# Altium PCB PCB1.PcbDoc
Units mil, origin at the board's own origin, x right, y up, seen from the top; angles counter-clockwise.
Board outline 1574.8 x 1400.79 mil, 4 copper layers (Top Layer, PWR02, GND03, Bottom Layer), stack 46.063 mil thick; 65 components, 63 nets, 282 pads, 13 vias.
Unrouted connection lines stored in the file: 167.
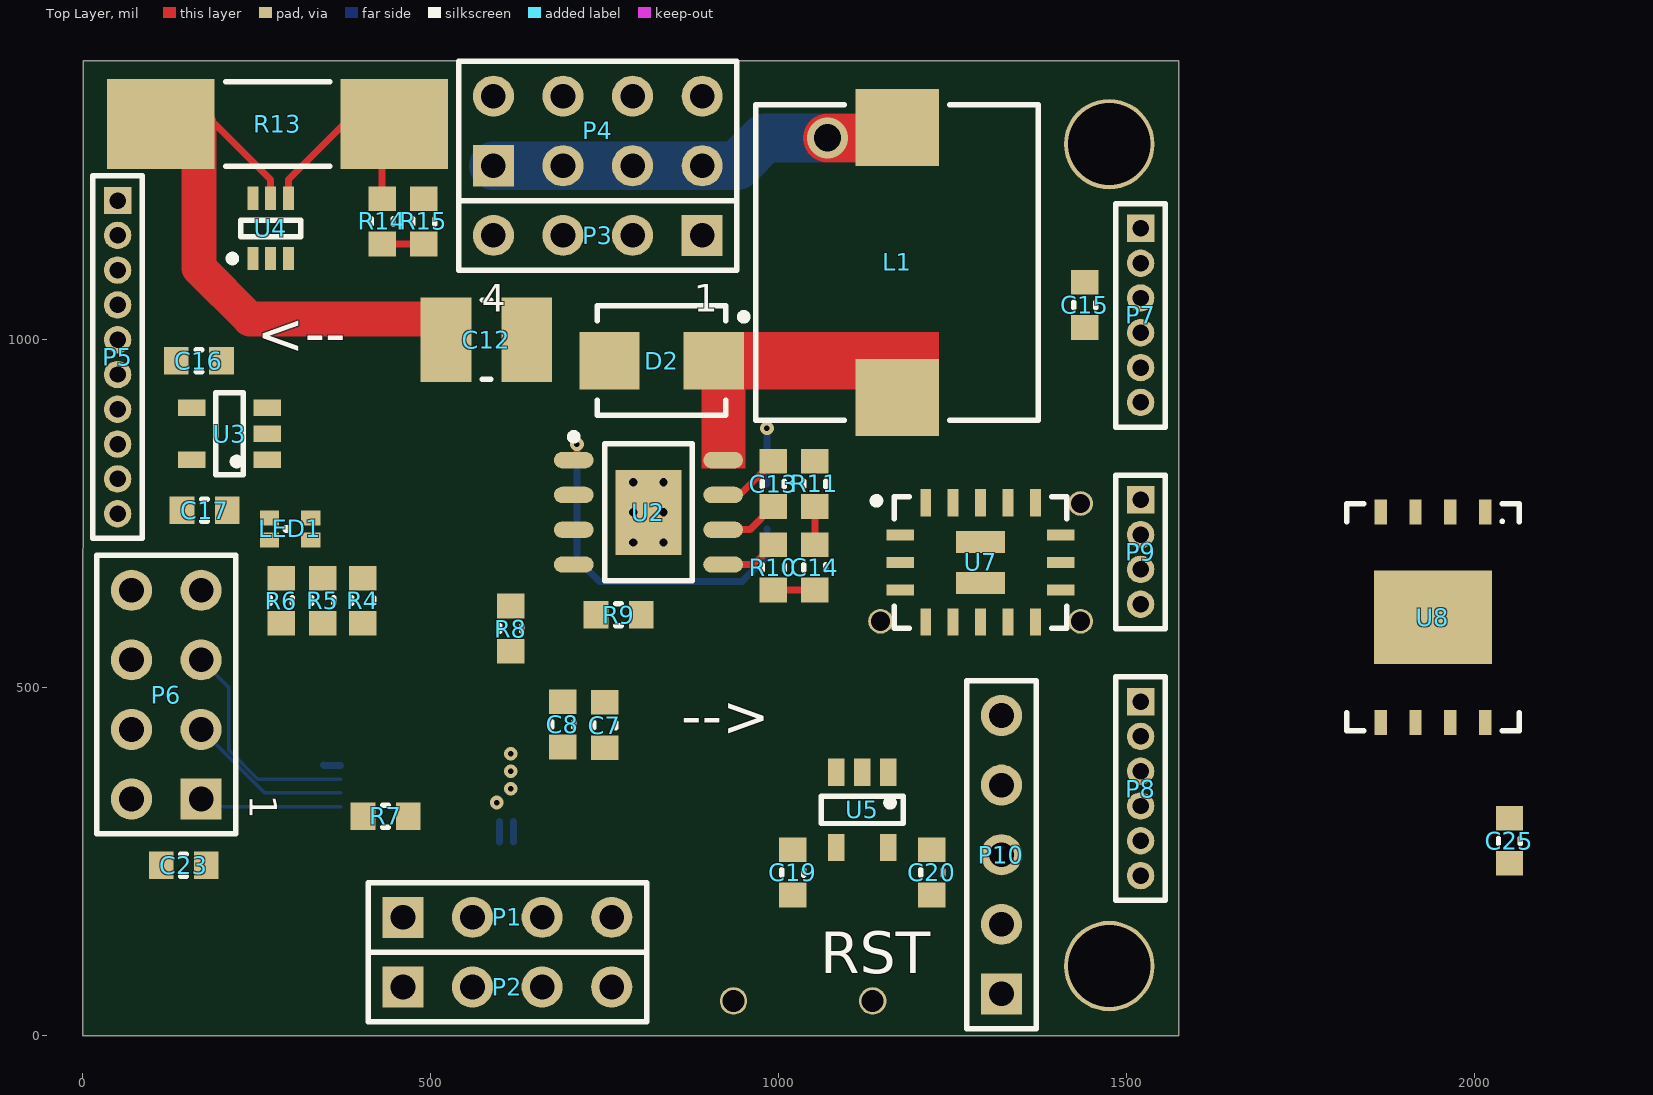
[diagram p0: Top Layer view]
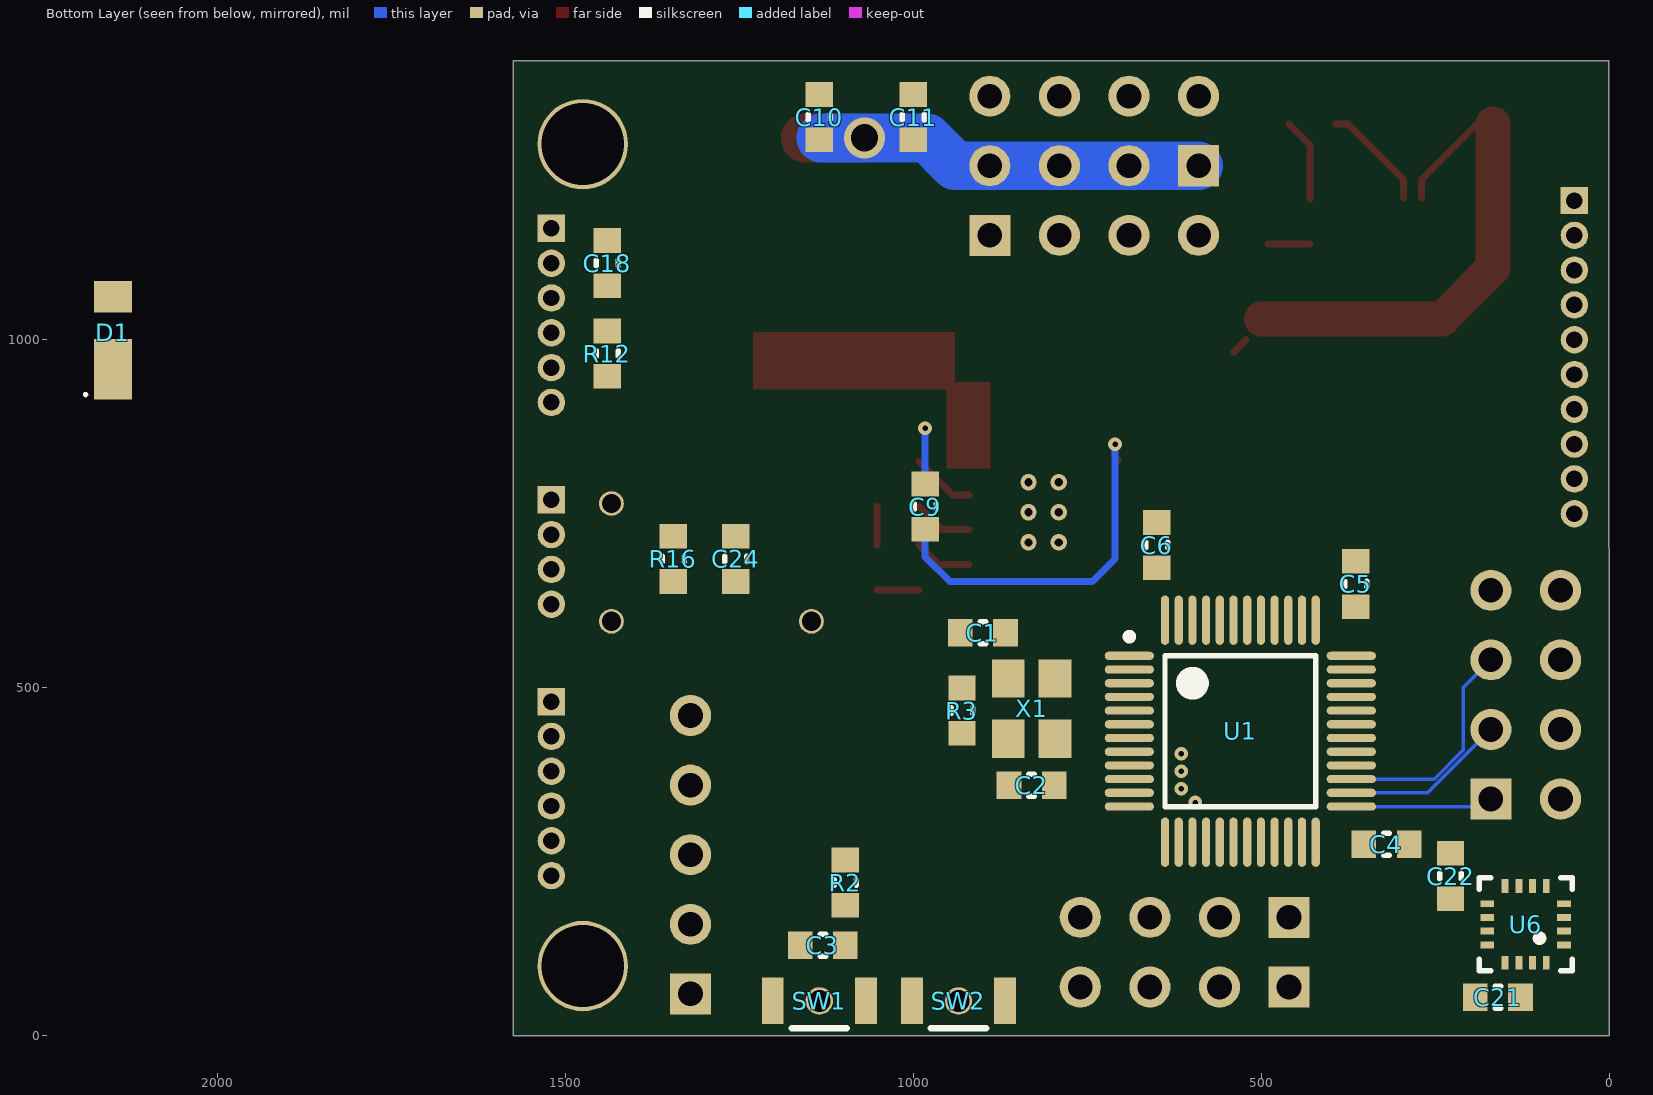
[diagram p1: Bottom Layer view, seen from below]

## Layer stack, top to bottom
Top Solder: solder mask 0.4, Solder Resist, Dk 3.5
Top Layer: signal copper 1.378
Dielectric 1: prepreg 7.874, FR-4, Dk 4.2
PWR02: signal copper 0.689
Dielectric 3: core 26.1811, Dk 4.2
GND03: signal copper 0.689
Dielectric 2: prepreg 7.874, Dk 4.2
Bottom Layer: signal copper 1.378
Bottom Solder: solder mask 0.4, Solder Resist, Dk 3.5

## Board outline
0,0 1574.8,0 1574.8,1400.79 0.79,1400.79

## Design rules (kind name [scope] priority, off if disabled: settings)
Clearance [All] p1: gap=5 ignorepadtopadclearanceinfootprint=FALSE
PolygonConnect [All] p1: connectstyle=Direct reliefconductorwidth=10 reliefentries=4 polygonreliefangle="90 Angle" airgapwidth=10
RoutingVias [All] p1: holewidth=7.87 width=19.68 viastyle="Through Hole" minholewidth=7.87 minwidth=19.68 maxholewidth=27.56 maxwidth=78.74
SolderMaskExpansion [All] p1: expansion=4
Width [All] p1: maxlimit=200 minlimit=5 preferedwidth=10 midlayer1_maxwidth=10 midlayer2_maxwidth=10 minimp=50.000000 maximp=50.000000 favimp=50.000000
30 further rules are at their usual default settings.

## Components (designator, comment, footprint, x,y, rotation, side; value= is the part's Value field where it differs from the comment)
C1 "20pF" 0603 900,579.02 r0 bottom
C2 "20pF" 0603 830,360 r0 bottom
C3 "1uF" 0603 1130,130 r0 bottom
C4 "100nF" 0603 320,275 r0 bottom
C5 "100nF" 0603 364,649 r270 bottom
C6 "100nF" 0603 649.96,705 r270 bottom
C7 "100nF" 0603 750,446.36 r90 top
C8 "10uF" 0603 689.45,447.36 r90 top
C9 "100nF" 0603 983,760.31 r90 bottom
C10 "22uF" 0603 1135,1320 r270 bottom
C11 "22uF" 0603 1000,1320 r270 bottom
C12 "10uF" 1210 580,1000 r180 top
C13 "8.2nF" 0603 992,792.79 r270 top
C14 "330pF" 0603 1052,672.79 r270 top
C15 "1uF" 0603 1440,1050 r90 top
C16 "470pF" 0603 166.81,970 r180 top
C17 "2.2uF" 0603 175,755 r180 top
C18 "100nF" 0603 1440,1110 r270 bottom
C19 "470pF" 0603 1020,234.53 r90 top
C20 "2.2uF" 0603 1220,234.53 r90 top
C21 "100nF" 0603 160,55 r0 bottom
C22 "4.7uF" 0603 228,229.39 r270 bottom
C23 "0.22uF" 0603 145,245 r0 top
C24 "100nF" 0603 1255,685 r90 bottom
C25 "100nF" 0603 2050,280 r90 top
D1 "DFLS130L-7" PowerDI123 2150,1000 r90 bottom
D2 "SK1045B" "SMB (DO-214AA)" 831.65,970 r0 top
L1 "Inductor" Ind1040 1170,1111 r90 top
LED1 "RGB_CA" RGB1.6*1.6 297.93,728.13 r270 top
P1 "Header 4" HDR1X4 460,170 r0 top
P2 "Header 4" HDR1X4 460,70 r0 top
P3 "Header 4" HDR1X4 890,1150 r180 top
P4 "Header 4X2" HDR2X4 590,1250 r0 top
P5 "MHDR1X10" MHDR1X10 50,1200 r270 top
P6 "Header 4X2" HDR2X4 170,340 r90 top
P7 "MHDR1X6" MHDR1X6 1520,1160 r270 top
P8 "MHDR1X6" MHDR1X6 1520,480 r270 top
P9 "MHDR1X4" MHDR1X4 1520,770 r270 top
P10 "Header 5" HDR1X5 1320,60 r90 top
R2 "10k" 0603 1097.52,220 r90 bottom
R3 "1M" 0603 930,467.05 r90 bottom
R4 "1k" 0603 402.52,625 r270 top
R5 "1k" 0603 345,625 r270 top
R6 "1k" 0603 285,625 r270 top
R7 "10k" 0603 435,315 r180 top
R8 "10k" 0603 615,585 r270 top
R9 "20k" 0603 770,605 r180 top
R10 "91k" 0603 992,672.79 r270 top
R11 "15k" 0603 1052,792.79 r270 top
R12 "680" 0603 1440,980 r90 bottom
R13 "1mR" 2512 280,1310 r180 top
R14 "4.7k" 0603 430,1170 r90 top
R15 "1k" 0603 490,1170 r270 top
R16 "0R" 0603 1345,685 r270 bottom
SW1 "Btn" BTN_B3U_B 1135,50 r0 bottom
SW2 "Btn" BTN_B3U_B 935,50 r0 bottom
U1 "STM32F103C8T6" LQFP48_N 530,437.52 r180 bottom
U2 "LMR14030 EZ" SOP8-Pad 812.72,752 r0 top
U3 "MIC5219" SOT23-5 210.83,865 r180 top
U4 "INA190" SC70 270,1160 r90 top
U5 "MIC5219" SOT23-5 1120,324.53 r270 top
U6 "QMC5883L" QMC5883 120,160 r0 bottom
U7 "SDP3x_D" SDP3x 1290,680 r0 top
U8 "W25Q128VE" WSON8-8x6mm 1940,601.18 r270 top
X1 "8M" XTAL-3225-4 830,470 r90 bottom

## Footprints (in the part's own frame and the unit in brackets; to place one, negate y for a bottom-side part, rotate by r counter-clockwise, add the part's x,y. Pads: shape width x height; smd on the part's side, far side on the other; paste and mask are expansions set on the pad)
0603 [mm]
  rect 0.9x1 smd: 1(-0.825,0) 2(0.825,0)
  silkscreen extent -0.1,-0.4 0.1,0.4
1210 [mm]
  rect 1.85x3.1 smd: 1(-1.475,0) 2(1.475,0)
  silkscreen extent -0.15,-1.45 0.15,1.45
2512 [mm]
  rect 1.15x3.3 smd: 1(-2.875,0) 2(2.875,0)
  silkscreen extent -1.9,-1.55 1.9,1.55, body extent -3.3,-1.7 3.3,1.7, height 0.65
BTN_B3U_B [mm]
  rect 0.8x1.7 smd: 1(-1.7,0) 2(1.7,0)
  round 1 hole 0.8: ""(0,0)
  silkscreen extent -1,1 1,1
HDR1X4 [mm] "Connector; Header; 4 Position"
  rect 1.5x1.5 hole 0.9: 1(0,0)
  round 1.5 hole 0.9: 2(2.54,0) 3(5.08,0) 4(7.62,0)
  silkscreen extent -1.27,-1.27 8.89,1.27
HDR1X5 [mm] "Connector; Header; 5 Position"
  rect 1.5x1.5 hole 0.9: 1(0,0)
  round 1.5 hole 0.9: 2(2.54,0) 3(5.08,0) 4(7.62,0) 5(10.16,0)
  silkscreen extent -1.27,-1.27 11.43,1.27
HDR2X4 [mm] "Connector; Header; 4x2 Position"
  rect 1.5x1.5 hole 0.9: 1(0,0)
  round 1.5 hole 0.9: 2(0,2.54) 3(2.54,0) 4(2.54,2.54) 5(5.08,0) 6(5.08,2.54) 7(7.62,0) 8(7.62,2.54)
  silkscreen extent -1.27,-1.27 8.89,3.81
Ind1040 [mm] "Inductor 11.5*10*4"
  rect 2.8x3.05 smd: 1(-4.925,0) 2(4.925,0)
  silkscreen extent -5.75,-5.15 5.75,5.15
LQFP48_N [mm] "Thin QFP, 48-Leads, Body 7x7mm, Pitch 0.5mm, IPC Medium Density"
  oval 1.8x0.3 smd: 1(-4.05,2.75) 2(-4.05,2.25) 3(-4.05,1.75) 4(-4.05,1.25) 5(-4.05,0.75) 6(-4.05,0.25) 7(-4.05,-0.25) 8(-4.05,-0.75) 9(-4.05,-1.25) 10(-4.05,-1.75) 11(-4.05,-2.25) 12(-4.05,-2.75) 25(4.05,-2.75) 26(4.05,-2.25) 27(4.05,-1.75) 28(4.05,-1.25) 29(4.05,-0.75) 30(4.05,-0.25) 31(4.05,0.25) 32(4.05,0.75) 33(4.05,1.25) 34(4.05,1.75) 35(4.05,2.25) 36(4.05,2.75)
  oval 0.3x1.8 smd: 13(-2.75,-4.05) 14(-2.25,-4.05) 15(-1.75,-4.05) 16(-1.25,-4.05) 17(-0.75,-4.05) 18(-0.25,-4.05) 19(0.25,-4.05) 20(0.75,-4.05) 21(1.25,-4.05) 22(1.75,-4.05) 23(2.25,-4.05) 24(2.75,-4.05) 37(2.75,4.05) 38(2.25,4.05) 39(1.75,4.05) 40(1.25,4.05) 41(0.75,4.05) 42(0.25,4.05) 43(-0.25,4.05) 44(-0.75,4.05) 45(-1.25,4.05) 46(-1.75,4.05) 47(-2.25,4.05) 48(-2.75,4.05)
  silkscreen extent -4.18,-2.75 2.75,3.57, body extent -3.5,-3.5 3.5,3.5, height 1.6
MHDR1X4 [mm] "Connector; Header; 4 Position"
  rect 1x1 hole 0.6: 1(0,0)
  round 1 hole 0.6: 2(1.27,0) 3(2.54,0) 4(3.81,0)
  silkscreen extent -0.9,-0.9 4.71,0.9
MHDR1X6 [mm] "Connector; Header; 6 Position"
  rect 1x1 hole 0.6: 1(0,0)
  round 1 hole 0.6: 2(1.27,0) 3(2.54,0) 4(3.81,0) 5(5.08,0) 6(6.35,0)
  silkscreen extent -0.9,-0.9 7.25,0.9
MHDR1X10 [mm] "Connector; Header; 10 Position"
  rect 1x1 hole 0.6: 1(0,0)
  round 1 hole 0.6: 2(1.27,0) 3(2.54,0) 4(3.81,0) 5(5.08,0) 6(6.35,0) 7(7.62,0) 8(8.89,0) 9(10.16,0) 10(11.43,0)
  silkscreen extent -0.9,-0.9 12.33,0.9
PowerDI123 [mm] "SODFL, 2-Leads, Body 1.78x3.70mm, IPC Medium Density"
  rect 1.15x1.4 smd: 1(1.575,0)
  rect 2.2x1.4 smd: 2(-1.075,0)
  silkscreen extent -2.05,0.95 -1.95,1.05
QMC5883 [mm]
  rect 0.5x0.25 smd: 1(-1.4,0.75) 2(-1.4,0.25) 3(-1.4,-0.25) 4(-1.4,-0.75) 9(1.4,-0.75) 10(1.4,-0.25) 11(1.4,0.25) 12(1.4,0.75)
  rect 0.25x0.5 smd: 5(-0.75,-1.4) 6(-0.25,-1.4) 7(0.25,-1.4) 8(0.75,-1.4) 13(0.75,1.4) 14(0.25,1.4) 15(-0.25,1.4) 16(-0.75,1.4)
  silkscreen extent -1.7,-1.7 1.7,1.7, body extent -1.55,-1.55 1.55,1.55, height 0.95
RGB1.6*1.6 [mm]
  rect 0.55x0.7 smd: 1(-0.4,0.75) 2(0.4,0.75) 3(0.4,-0.75) 4(-0.4,-0.75)
  silkscreen extent -0.08,-0.2 0.08,-0.05
SC70 [mm]
  rect 0.85x0.4 smd: 1(-1.1,0.65) 2(-1.1,0) 3(-1.1,-0.65) 4(1.1,-0.65) 5(1.1,0) 6(1.1,0.65)
  silkscreen extent -1.22,-1.1 0.3,1.52, body extent -1.2,-1.07 1.2,1.07, height 1.1
SDP3x [mm] "QFN, 16-Leads, Body 6.00x4.50mm, Pitch 1.00mm, Thermal Pad 1.80x2.60mm, IPC Low Density"
  rect 1x0.4 smd: 1(-2.925,1) 2(-2.925,0) 3(-2.925,-1) 9(2.925,-1) 10(2.925,0) 11(2.925,1)
  rect 0.4x1 smd: 4(-2,-2.175) 5(-1,-2.175) 6(0,-2.175) 7(1,-2.175) 8(2,-2.175) 12(2,2.175) 13(1,2.175) 14(0,2.175) 15(-1,2.175) 16(-2,2.175)
  round 0.9 hole 0.7: ""(-3.65,-2.15) ""(3.65,-2.15) ""(3.65,2.15)
  rect 1.8x0.8 smd: ""(0,-0.75) ""(0,0.75)
  silkscreen extent -3.92,-2.4 3.15,2.4
"SMB (DO-214AA)" [mm] "Molded Diode, 2-Leads, Body 4.38x3.62mm, IPC Medium Density"
  rect 2.2x2.1 smd: 1(-1.9,0) 2(1.9,0)
  silkscreen extent -2.35,-2 3.13,2, body extent -2.35,-1.97 2.35,1.97, height 2.4
SOP8-Pad [mm]
  oval 1.45x0.6 smd: 1(-2.725,1.905) 2(-2.725,0.635) 3(-2.725,-0.635) 4(-2.725,-1.905) 5(2.725,-1.905) 6(2.725,-0.635) 7(2.725,0.635) 8(2.725,1.905)
  rect 2.4x3.1 smd: 9(0,0)
  silkscreen extent -2.85,-2.5 1.6,2.88
SOT23-5 [mm] "SOT23, 5-Leads, Body 2.90x2.80mm, Pitch 0.95mm, IPC Medium Density"
  rect 1x0.6 smd: 1(-1.375,0.95) 2(-1.375,0) 3(-1.375,-0.95) 4(1.375,-0.95) 5(1.375,0.95)
  silkscreen extent -0.5,-1.5 0.5,1.5
WSON8-8x6mm [mm]
  rect 0.9x0.45 smd: 1(-3.84,1.905) 2(-3.84,0.635) 3(-3.84,-0.635) 4(-3.84,-1.905) 5(3.84,-1.905) 6(3.84,-0.635) 7(3.84,0.635) 8(3.84,1.905)
  rect 3.4x4.3 smd paste-1.7: 9(0,0)
  silkscreen extent -4.15,-3.15 4.15,3.15
XTAL-3225-4 [mm]
  rect 1.4x1.2 smd: 1(-1.1,-0.85) 2(1.1,0.85) ""(-1.1,0.85) ""(1.1,-0.85)

## Part data
C1 C2 C3 C4 C5 C6 C7 C8 C9 C10 C11 C12 C13 C14 C15 C16 C17 C18 C19 C20 C21 C22 C23 C24 C25: library part Cap
D1 D2: library part Diode
P1 P2 P3 P9: "Header, 4-Pin", LatestRevisionDate=17-Jul-2002, LatestRevisionNote="Re-released for DXP Platform.", Publisher="Altium Limited"
P4 P6: "Header, 4-Pin, Dual row", LatestRevisionDate=17-Jul-2002, LatestRevisionNote="Re-released for DXP Platform.", Publisher="Altium Limited"
P5: "Header, 10-Pin", LatestRevisionDate=17-Jul-2002, LatestRevisionNote="Re-released for DXP Platform.", Publisher="Altium Limited"
P7 P8: "Header, 6-Pin", LatestRevisionDate=17-Jul-2002, LatestRevisionNote="Re-released for DXP Platform.", Publisher="Altium Limited"
P10: "Header, 5-Pin", LatestRevisionDate=17-Jul-2002, LatestRevisionNote="Re-released for DXP Platform.", Publisher="Altium Limited"
R2 R3 R4 R5 R6 R7 R8 R9 R10 R11 R12 R13 R14 R15 R16: library part Res
U1: "STM32 ARM-based 32-bit MCU with 64 Kbytes Flash, 48-pin LQFP, Industrial Temperature", ComponentLink1Description="Manufacturer Link", ComponentLink1URL=www.st.com/stm32, ComponentLink2Description=Datasheet, ComponentLink2URL=http://www.st.com/stonline/products/literature/ds/13587.pdf, DatasheetVersion="rev6, Mar-2008", PackageDescription="48-Pin Low-Profile Quad Flat Pack, 7 x 7 mm Body, 0.5 mm Pitch (LQFP48)", PackageReference=LQFP48, PackageVersion=Mar-2008, Published=30-May-2008, Publisher="Altium Limited"
U8: library part W25QxxxVE/A
X1: library part XTAL

## Free pads (board coordinates)
  rect 129.92x129.92 smd: ""(100,1310) ""(460,1310)
  round 129.92 hole 118.11: ""(1474.8,100) ""(1474.8,1281.1)

## Via types
v1: diameter 19.68, hole 7.87, Top Layer to Bottom Layer, 6 vias
v2: diameter 23.62, hole 11.81, Top Layer to Bottom Layer, tented both sides, 6 vias
v3: diameter 59.06, hole 39.37, Top Layer to Bottom Layer, 1 vias

## Nets (pads, with @x,y where several pads share a name; then routed paths per layer and width w, separated by ;. In a path a pad name is that pad's centre, name@x,y a point inside that pad or via, vN(x,y) a via of type N, cw(c..) or ccw(c..) an arc to the next point about the centre after c; other vN are vias at no path point)
+5: D1.2 P2.1 P6.8 P8.4 P9.4 U3.1 U3.3 U5.1 U5.3
+5.3: C10.2 C11.2 C14.2 D1.1 L1.2 P4.1 P4.3 P4.5 P4.7 P7.5 P7.6 R10.2 | length 728.8
  Top Layer w10: R10.2 C14.2 ; L1.2@1155.1,1290 L1.2
  Top Layer w70: v3(1070,1290) L1.2@1155.1,1290
  Bottom Layer w10: C10.2@1132.52,1290 C10.2
  Bottom Layer w70: P4.1 P4.3 P4.5 P4.7 940,1250 980,1290 v3(1070,1290) C10.2@1132.52,1290
ADC1: P6.2 U1.14 | length 29.5
  Bottom Layer w10: U1.14 U1.14@618.58,307.6
ADC2: P6.4 U1.15 | length 29.5
  Bottom Layer w10: U1.15 U1.15@598.9,307.6
BAT_IN: pad.@460,1310 R13.1 R14.2 U4.4 | length 277.4
  Top Layer w10: U4.4 295.59,1230 375.59,1310 R13.1 ; R14.2 430,1280 pad.@460,1310
BAT_OUT: C12.2 pad.@100,1310 R13.2 U2.2 U2.3 U4.5 | length 758.9
  Top Layer w10: R13.2 190,1310 270,1230 U4.5 ; C12.2 C12.2@540,981.93
  Top Layer w50: R13.2 166.81,1103.19 240,1030 C12.2@500,1030
CS: U1.33 U8.1
GND: C1.2 C2.2 C3.2 C4.1 C5.1 C6.1 C7.2 C8.2 C10.1 C11.1 C12.1 C13.1 C15.2 C16.1 C17.1 C18.1 C19.1 C20.1 C21.2 C22.1 C24.2 C25.1 D2.1 P1.4 P2.4 P4.2 P4.4 P4.6 P4.8 P5.10 P6.6 P7.1 P7.2 P8.1 P9.1 P10.2 R7.2 R8.1 R9.1 R11.1 R15.1 R16.1 SW1.2 SW2.2 U1.8 U1.23 U1.35 U1.47 U2.7 U2.9 U3.2 U4.1 U4.2 U5.2 U6.9 U6.11 U7.1 U7.2 U7.3 U7.6 U7.10 U7.11 U8.4 | length 92
  Top Layer w10: U2.7 943.73,777 C13.1
  other v2: 791.06,708.69 834.37,708.69 791.06,752 834.37,752 791.06,795.31 834.37,795.31
GPIO1: P6.1 U1.25 | length 205
  Bottom Layer w5: P6.1 180.75,329.25 U1.25
GPIO2: P6.3 U1.26 | length 238.3
  Bottom Layer w5: P6.3 261.06,348.94 U1.26
GPIO3: P6.5 U1.27 | length 324.3
  Bottom Layer w5: P6.5 210,500 210,410 251.38,368.62 U1.27
GPIO4: P6.7 U1.28 | length 24.9
  Bottom Layer w10: U1.28@346.02,389.14 346.86,388.31 U1.28
IOUT: C15.1 P7.4 R12.2
KEY: SW2.1 U1.16
LED1: R4.2 U1.17
LED2: R5.2 U1.18
LED3: R6.2 U1.19
MISO: U1.40 U8.2
MOSI: U1.41 U8.5
NetC9_1: C9.1 U2.1 | length 530.9
  Top Layer w10: U2.1 710,831.57 v1(710,850)
  Bottom Layer w10: v1(710,850) 710,685 742.48,652.52 947.52,652.52 983,688 C9.1
NetC9_2: C9.2 D2.2 L1.1 U2.8 | length 80.2
  Bottom Layer w10: C9.2 v1(983,873)
NetC13_2: C13.2 U2.6 | length 85.8
  Top Layer w10: U2.6 958.69,727 C13.2
NetC14_1: C14.1 R10.1 R11.2 U2.5 | length 138.7
  Top Layer w10: U2.5 963.73,677 R10.1 ; C14.1 R11.2
NetC16_2: C16.2 U3.4
NetC19_2: C19.2 U5.4
NetC22_2: C22.2 U6.10
NetC23_1: C23.1 U6.8
NetC23_2: C23.2 U6.12
NetLED1_1: LED1.1 R4.1
NetLED1_2: LED1.2 R5.1
NetLED1_3: LED1.3 R6.1
NetR7_1: R7.1 U1.20
NetR8_2: R8.2 U1.44
NetR9_2: R9.2 U2.4
NetR12_1: R12.1 U4.6
NetR16_2: R16.2 U7.9
OSC_IN: C1.1 R3.2 U1.5 X1.2
OSC_OUT: C2.1 R3.1 U1.6 X1.1
PWM_IN1: P5.8 U1.29
PWM_IN2: P5.7 U1.30
PWM_IN3: P5.6 U1.31
PWM_IN4: P5.5 U1.32
PWM_IN5: P5.4 U1.42
PWM_IN6: P5.3 U1.43
PWM_IN7: P5.2 U1.45
PWM_IN8: P5.1 U1.46
PWM_OUT1: P3.1 U1.10
  other v1: 615,405
PWM_OUT2: P3.2 U1.11
  other v1: 615,380
PWM_OUT3: P3.3 U1.12
  other v1: 615,355
PWM_OUT4: P3.4 U1.13
  other v1: 595,335
RST: C3.1 R2.1 SW1.1 U1.7
RX: P2.2 U1.22
SCK: U1.39 U8.6
SCL: P8.6 U6.1 U7.5
SDA: P8.5 U6.16 U7.8
SWCLK: P1.3 U1.37
SWDIO: P1.2 U1.34
TEL_RX: P9.3 P10.3
TEL_TX: P9.2 P10.4
TX: P2.3 U1.21
UOUT: C18.2 P7.3 R14.1 R15.2 | length 60
  Top Layer w10: R14.1 R15.2
VCC: C4.2 C5.2 C6.2 C7.1 C8.1 C17.2 C21.1 C25.2 LED1.4 P1.1 U1.1 U1.9 U1.24 U1.36 U1.48 U3.5 U4.3 U6.2 U6.4 U6.13 U8.3 U8.7 U8.8
VCC_TEL: C20.2 C24.1 P10.1 R2.2 U5.5 U7.7
pads on no net: P5.9 P8.2 P8.3 P10.5 SW1. SW2. U1.2 U1.3 U1.4 U1.38 U6.3 U6.5 U6.6 U6.7 U6.14 U6.15 U7. U7.4 U7.12 U7.13 U7.14 U7.15 U7.16 U8.9 X1.

## Other copper
Top Layer:
  rectangle net NetC9_2: 889,815 952,939
  rectangle net NetC9_2: 940,928.66 1230,1011.34
  region: 940,1010

## Silkscreen, mask and mechanical layers (free items; w line width, h text height)
Top Overlay:
  text "4" at 573.19,1040 h40
  text "1" at 878.19,1040 h40
  text "<--" at 250,980 h60
  text "-->" at 860,430 h60
  text "1" at 240,346.34 h40 r270
  text "RST" at 1060,90 h60
Mechanical 1:
  lines w10: 0,0 1574.8,0 1574.8,1400.79 0.79,1400.79 0.79,0.79